# EAGLE board c64-uni-cart (EAGLE 9.5.2)
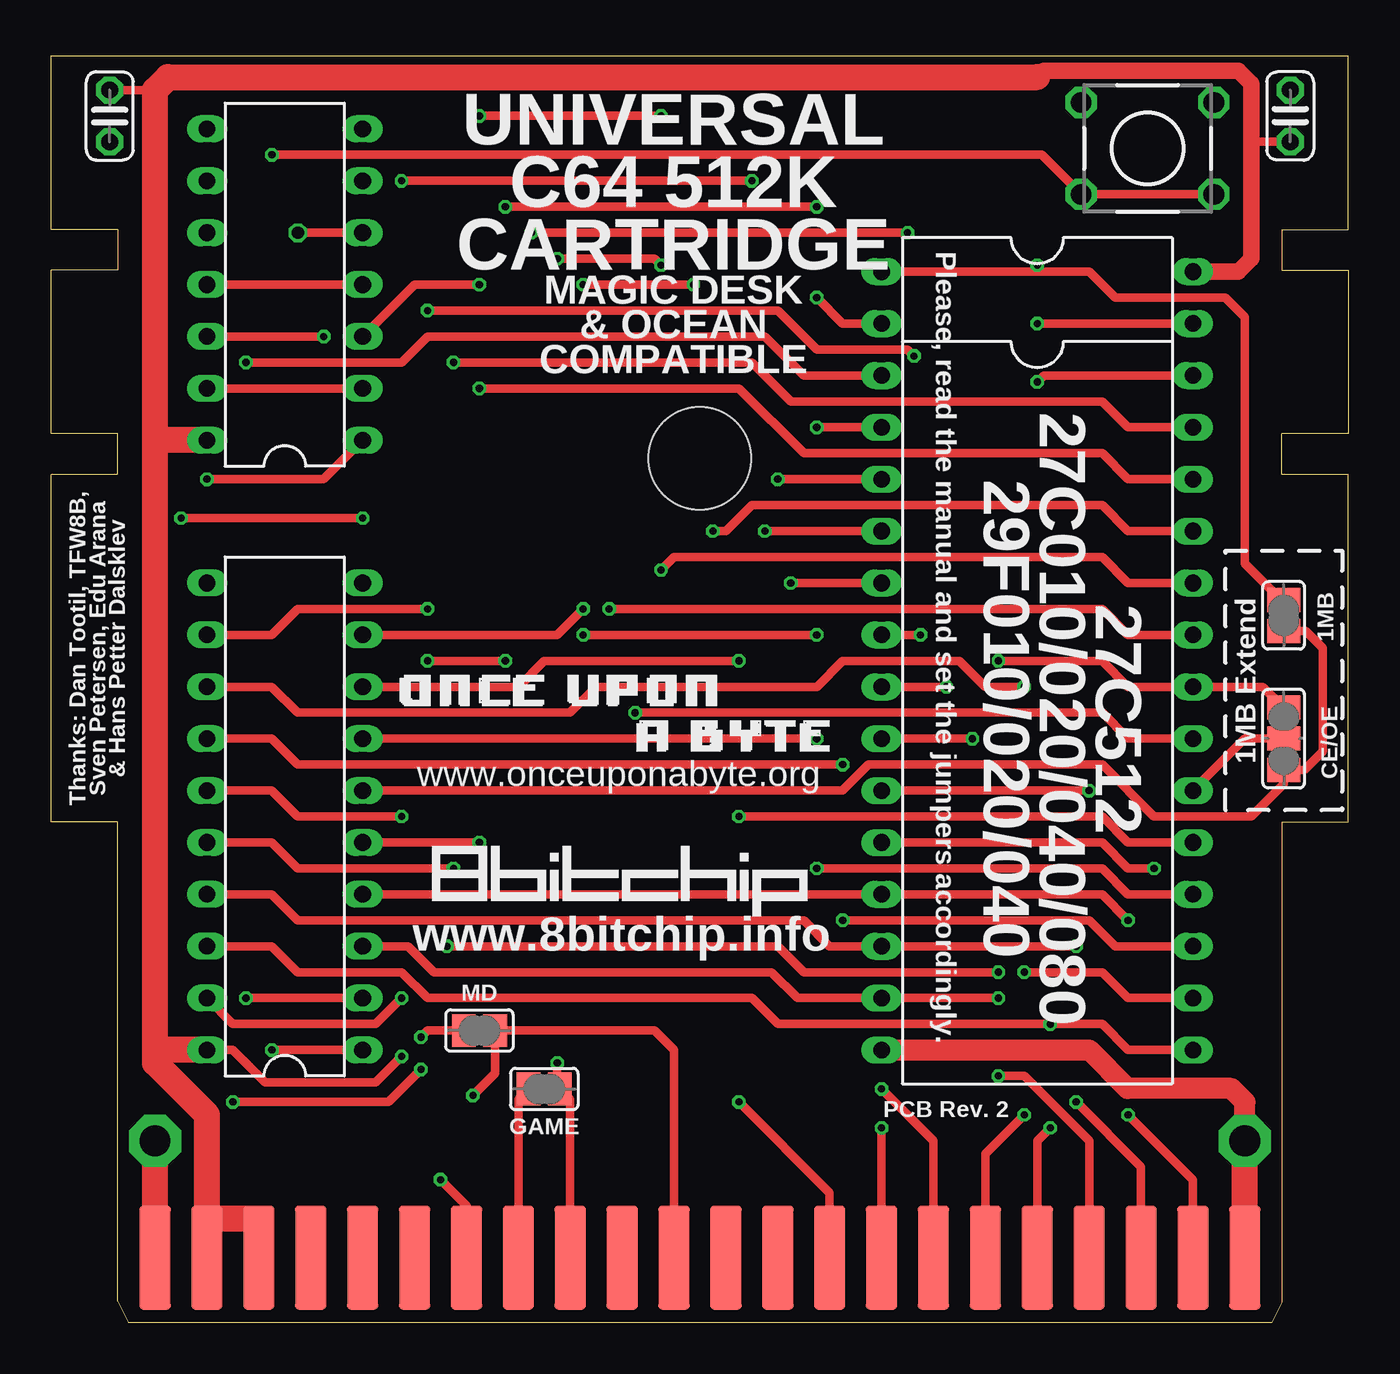
[diagram p0: board, top side]
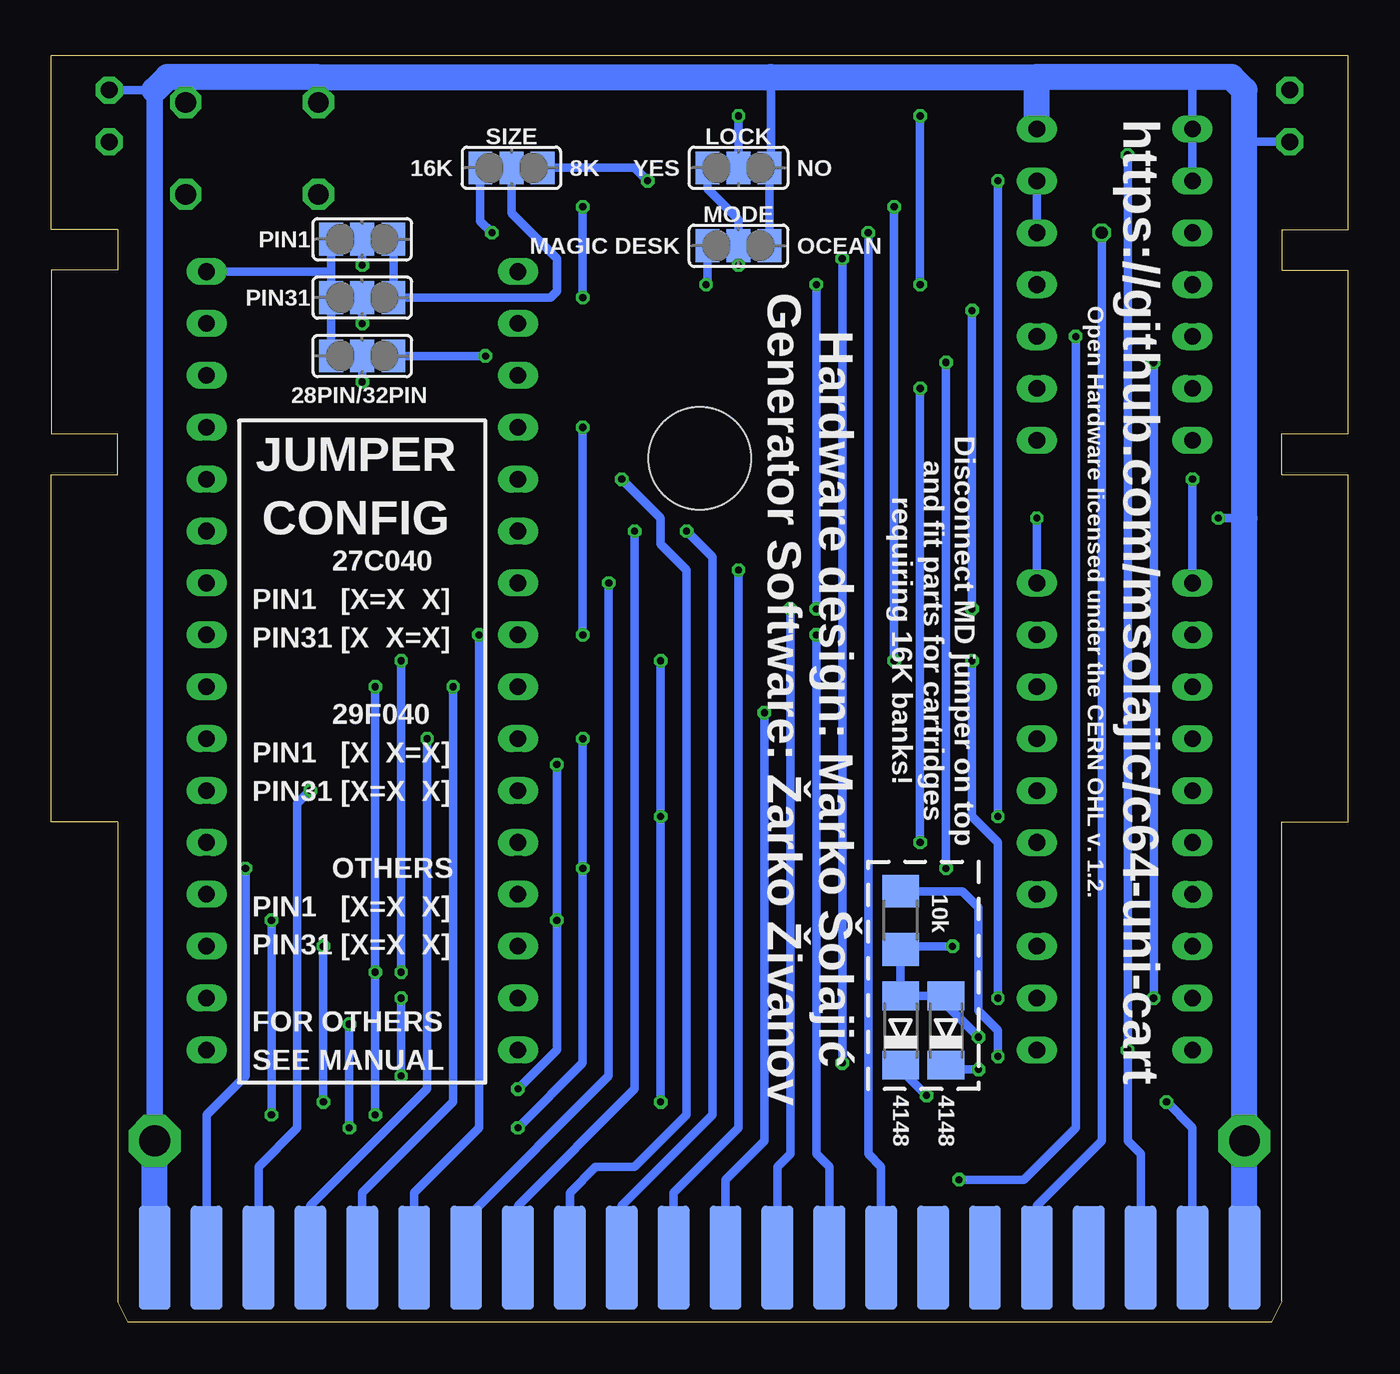
[diagram p1: board, bottom side, seen from below]

Size 63.5 x 62 mm. Coordinates in mm from the lower left corner, seen from the top.
Copper layers (1*16): Top 0.035mm / dielectric 1.5mm / Bottom 0.035mm
Design rules "dirt_cheap_dirty_boards.v1.1 *": minimum track width 6mil, minimum drill 12mil, track to track 6mil, track to pad 6mil, pad to pad 6mil, via to via 6mil, smd to smd 0mil, copper to edge 10mil, drill to drill 10mil, minimum pad ring 10mil, minimum via ring 6mil, stop-mask expansion 2mil, vias tented up to drill 25mil, thermal gap 10mil

## Footprints (pad centres in the part's own frame; a part is rotated, then mirrored left to right if it is on the bottom)
SJ = smd 1.168 x 1.6: 1 -0.762,0; 2 0.762,0
SJ_2 = smd 1.168 x 1.6: 1 -1.524,0; 2 0,0; 3 1.524,0
C025-024X044 = drill 0.813 octagon: 1 -1.27,0; 2 1.27,0
MINIMELF = smd 1.4 x 1.8: A 1.7,0; C -1.7,0
DIL20 = drill 0.813 long: 1 -11.43,-3.81; 2 -8.89,-3.81; 3 -6.35,-3.81; 4 -3.81,-3.81; 5 -1.27,-3.81; 6 1.27,-3.81; 7 3.81,-3.81; 8 6.35,-3.81; 9 8.89,-3.81; 10 11.43,-3.81; 11 11.43,3.81; 12 8.89,3.81; 13 6.35,3.81; 14 3.81,3.81; 15 1.27,3.81; 16 -1.27,3.81; 17 -3.81,3.81; 18 -6.35,3.81; 19 -8.89,3.81; 20 -11.43,3.81
DIL14 = drill 0.813 long: 1 -7.62,-3.81; 2 -5.08,-3.81; 3 -2.54,-3.81; 4 0,-3.81; 5 2.54,-3.81; 6 5.08,-3.81; 7 7.62,-3.81; 8 7.62,3.81; 9 5.08,3.81; 10 2.54,3.81; 11 0,3.81; 12 -2.54,3.81; 13 -5.08,3.81; 14 -7.62,3.81
DIL32-6 = drill 0.813 long: 1 -19.05,-7.62; 2 -16.51,-7.62; 3 -13.97,-7.62; 4 -11.43,-7.62; 5 -8.89,-7.62; 6 -6.35,-7.62; 7 -3.81,-7.62; 8 -1.27,-7.62; 9 1.27,-7.62; 10 3.81,-7.62; 11 6.35,-7.62; 12 8.89,-7.62; 13 11.43,-7.62; 14 13.97,-7.62; 15 16.51,-7.62; 16 19.05,-7.62; 17 19.05,7.62; 18 16.51,7.62; 19 13.97,7.62; 20 11.43,7.62; 21 8.89,7.62; 22 6.35,7.62; 23 3.81,7.62; 24 1.27,7.62; 25 -1.27,7.62; 26 -3.81,7.62; 27 -6.35,7.62; 28 -8.89,7.62; 29 -11.43,7.62; 30 -13.97,7.62; 31 -16.51,7.62; 32 -19.05,7.62
R1206 = smd 1.6 x 1.803: 1 -1.422,0; 2 1.422,0
DTS-6 = drill 1.016 octagon: 1 -3.25,2.25; 2 3.25,2.25; 3 -3.25,-2.25; 4 3.25,-2.25
C64_STUMPY = smd 1.524 x 5.08: 1 5.08,3.175; 2 7.62,3.175; 3 10.16,3.175; 4 12.7,3.175; 5 15.24,3.175; 6 17.78,3.175; 7 20.32,3.175; 8 22.86,3.175; 9 25.4,3.175; 10 27.94,3.175; 11 30.48,3.175; 12 33.02,3.175; 13 35.56,3.175; 14 38.1,3.175; 15 40.64,3.175; 16 43.18,3.175; 17 45.72,3.175; 18 48.26,3.175; 19 50.8,3.175; 20 53.34,3.175; 21 55.88,3.175; 22 58.42,3.175 | smd 1.524 x 5.08 bottom: A 5.08,3.175; B 7.62,3.175; C 10.16,3.175; D 12.7,3.175; E 15.24,3.175; F 17.78,3.175; H 20.32,3.175; J 22.86,3.175; K 25.4,3.175; L 27.94,3.175; M 30.48,3.175; N 33.02,3.175; P 35.56,3.175; R 38.1,3.175; S 40.64,3.175; T 43.18,3.175; U 45.72,3.175; V 48.26,3.175; W 50.8,3.175; X 53.34,3.175; Y 55.88,3.175; Z 58.42,3.175 | hole 5: 31.74,42.3

## Placement (x,y rotation side)
1MB  [SJ]  60.34,34.61 90 top
28PIN/32PIN  [SJ_2]  48.27,47.31 0 bottom
C2  100n  [C025-024X044]  2.87,59.05 270 top
C3  100n  [C025-024X044]  60.65,59.05 90 top
CE/OE  [SJ_2]  60.34,28.57 90 top
D1  [MINIMELF]  21.92,14.29 90 bottom
D2  [MINIMELF]  19.7,14.29 90 bottom
GAME  [SJ]  24.14,11.43 180 top
IC1  74LS273  [DIL20]  11.44,24.77 90 top
IC2  74LS02  [DIL14]  11.44,50.8 90 top
IC3  29F040  [DIL32-6]  48.27,32.38 270 top
LOCK  [SJ_2]  29.86,56.52 180 bottom
MD  [SJ]  20.96,14.29 180 top
MODE  [SJ_2]  29.86,52.7 0 bottom
PIN1  [SJ_2]  48.27,53.02 0 bottom
PIN31  [SJ_2]  48.27,50.16 0 bottom
R1  [R1206]  21.92,19.68 270 bottom
S3  DTS-6  [DTS-6]  53.67,57.47 180 top
SIZE  [SJ_2]  40.97,56.52 180 bottom
U$1  [C64_STUMPY]  0.01,0 0 top

## Library data of the parts
1MB 28PIN/32PIN CE/OE GAME LOCK MD MODE PIN1 PIN31 SIZE = jumper
C2 C3 = rcl
D1 D2 = diode
IC1 IC2 = 74xx-eu
IC3 = 0RB_Memory
R1 = rcl; SPICEPREFIX: R
S3 = switch-tact
U$1 = 64kb_cart-twoboxes-short

## Nets
A0: IC3.12 U$1.Y
A1: IC3.11 U$1.X
A2: IC3.10 U$1.W
A3: IC3.9 U$1.V
A4: IC3.8 U$1.U
A5: IC3.7 U$1.T
A6: IC3.6 U$1.S
A7: IC3.5 U$1.R
A8: IC3.27 U$1.P
A9: IC3.26 U$1.N
A10: IC3.23 U$1.M
A11: IC3.25 U$1.L
A12: IC3.4 U$1.K
A13: SIZE.3 U$1.J
CE: 1MB.1 CE/OE.1 IC1.6
D0: IC1.4 IC3.13 U$1.21
D1: IC1.17 IC3.14 U$1.20
D2: IC1.3 IC3.15 U$1.19
D3: IC1.18 IC3.17 U$1.18
D4: IC1.13 IC3.18 U$1.17
D5: IC1.14 IC3.19 U$1.16
D6: IC1.7 IC3.20 U$1.15
D7: IC1.8 IC3.21 U$1.14
DIS: GAME.1 LOCK.3 MODE.2 U$1.9
EN: IC1.11 IC2.1
GND: C2.2 C3.2 IC1.10 IC2.7 IC2.8 IC2.9 IC3.16 LOCK.1 MODE.3 S3.3 S3.4 U$1.1 U$1.22 U$1.A U$1.Z
IO1: IC2.12 U$1.7
IO2: U$1.10
J17: 28PIN/32PIN.2 IC3.30
J18: 1MB.2 IC3.1 PIN1.2
JF: IC3.31 PIN31.2
N$1: GAME.2 U$1.8
N$2: IC2.3 LOCK.2
N$4: CE/OE.2 IC3.22
N$5: PIN1.3 PIN31.3 SIZE.2
N$6: IC1.9 MODE.1
N$7: IC2.4 IC2.11
N$9: IC2.2 IC2.13
OE: CE/OE.3 D1.A D2.A IC3.24 MD.2 R1.2
PHI2: IC2.5 IC2.6 U$1.E
RESET: IC1.1 S3.1 S3.2 U$1.C
ROMH: D2.C U$1.B
ROML: D1.C MD.1 U$1.11
S13: IC1.5 IC3.28
S14: IC1.16 IC3.29
S15: IC1.2 IC3.3
S16: IC1.19 IC3.2
S17: 28PIN/32PIN.3 IC1.12
S18: IC1.15 SIZE.1
VCC: 28PIN/32PIN.1 C2.1 C3.1 IC1.20 IC2.14 IC3.32 PIN1.1 PIN31.1 R1.1 U$1.2 U$1.3

## Tracks (layer width: path | path; a pad name or v marks a point on that pad's centre or on a via)
A0  (via drill 0.35)
  Top 0.406: v53.98,22.23 52.71,22.23 51.45,23.5 IC3.12
  Bottom 0.406: U$1.Y 55.89,10.16 53.98,12.06 v53.98,22.23
A1  (via drill 0.35)
  Top 0.406: v50.81,26.04 IC3.11
  Bottom 0.406: U$1.X 53.35,7.62 51.45,9.53 51.45,25.4 v50.81,26.04
A2  (via drill 0.35)
  Top 0.406: v45.09,28.57 IC3.10
  Bottom 0.406: U$1.W 50.81,5.71 45.09,11.43 v45.09,28.57
A3  (via drill 0.35)
  Top 0.406: v43.82,31.11 IC3.9
  Bottom 0.406: U$1.V 48.27,6.35 43.82,10.79 v43.82,31.11
A4  (via drill 0.35)
  Top 0.406: v42.55,33.66 IC3.8
  Bottom 0.406: U$1.U 45.73,6.35 42.55,9.53 v42.55,33.66
A5  (via drill 0.35)
  Top 0.406: v36.2,36.2 IC3.7
  Bottom 0.406: U$1.T 43.19,5.08 36.2,12.06 v36.2,36.2
A6  (via drill 0.35)
  Top 0.406: v34.93,38.73 IC3.6
  Bottom 0.406: U$1.S 40.65,5.71 34.93,11.43 v34.93,38.73
A7  (via drill 0.35)
  Top 0.406: v35.57,41.27 IC3.5
  Bottom 0.406: U$1.R 38.11,6.35 36.84,7.62 34.93,7.62 32.39,10.16 32.39,36.83 33.66,38.1 33.66,39.37 v35.57,41.27
A8  (via drill 0.35)
  Top 0.406: IC3.27 52.71,38.73 51.45,40.01 34.3,40.01 33.03,38.73 v32.39,38.73
  Bottom 0.406: U$1.P 35.57,5.71 31.12,10.16 31.12,37.47 v32.39,38.73
A9  (via drill 0.35)
  Top 0.406: IC3.26 52.71,36.2 51.45,37.47 30.49,37.47 v29.86,36.83
  Bottom 0.406: U$1.N 33.03,6.35 29.86,9.53 v29.86,36.83
A10  (via drill 0.35)
  Top 0.406: v28.59,29.84 51.45,29.84 52.71,28.57 IC3.23
  Bottom 0.406: U$1.M 30.49,6.99 28.59,8.89 v28.59,29.84
A11  (via drill 0.35)
  Top 0.406: v27.32,34.92 51.45,34.92 52.71,33.66 IC3.25
  Bottom 0.406: U$1.L 27.95,7.62 27.32,8.26 v27.32,34.92
A12  (via drill 0.35)
  Top 0.406: v26.05,33.66 v37.48,33.66 | v37.48,43.81 IC3.4
  Bottom 0.406: U$1.K 25.41,7.62 26.05,8.26 v26.05,33.66 | v37.48,43.81 v37.48,33.66
A13  (via drill 0.35)
  Top 0.406: v41.92,53.34 v23.51,53.34
  Bottom 0.406: v23.51,53.34 23.51,8.26 22.87,7.62 U$1.J | SIZE.3 42.49,53.91 v41.92,53.34
CE
  Top 0.406: IC1.6 38.74,26.04 40.02,27.3 51.45,27.3 53.98,24.77 58.75,24.77 60.34,26.35 CE/OE.1 61.35,27.05 62.24,27.94 62.24,33.02 61.41,33.85 1MB.1
D0  (via drill 0.35)
  Top 0.406: U$1.21 55.89,6.99 v52.71,10.16 | v52.71,19.68 51.45,20.95 IC3.13 19.38,20.95 | IC1.4 19.38,20.95 | 19.38,20.95
  Bottom 0.406: v52.71,10.16 v52.71,19.68
D1  (via drill 0.35)
  Top 0.406: U$1.20 53.35,7.62 v50.17,10.79 | v50.17,18.41 IC3.14 38.11,18.41 36.84,19.68 12.07,19.68 10.8,20.95 IC1.17
  Bottom 0.406: v50.17,10.79 v50.17,18.41
D2  (via drill 0.35)
  Top 0.406: U$1.19 50.81,8.89 47.63,12.06 v46.36,12.06 | IC1.3 17.47,18.41 18.74,17.14 35.25,17.14 36.52,15.88 IC3.15 v46.36,15.88
  Bottom 0.406: v46.36,15.88 v46.36,12.06
D3  (via drill 0.35)
  Top 0.406: U$1.18 48.27,8.89 v48.91,9.53 | IC3.17 52.71,13.34 51.45,14.61 v48.91,14.61 35.57,14.61 34.3,15.88 19.7,15.88 18.43,15.88 17.16,17.14 12.07,17.14 10.8,18.41 IC1.18
  Bottom 0.406: v48.91,9.53 v48.91,14.61
D4  (via drill 0.35)
  Top 0.406: v47.63,17.14 51.45,17.14 52.71,15.88 IC3.18 | IC1.13 10.8,31.11 12.07,29.84 25.41,29.84 26.68,31.11 37.48,31.11 38.74,32.38 44.46,32.38 45.73,31.11 v47.63,31.11 | U$1.17 45.73,8.26 v47.63,10.16
  Bottom 0.406: v47.63,10.16 v47.63,17.14 v47.63,31.11
D5  (via drill 0.35)
  Top 0.406: U$1.16 43.19,8.89 v40.65,11.43 | v38.74,19.68 50.81,19.68 52.08,18.41 IC3.19 | IC1.14 10.8,28.57 12.07,27.3 v38.74,27.3
  Bottom 0.406: v40.65,11.43 38.74,13.34 v38.74,19.68 v38.74,27.3
D6  (via drill 0.35)
  Top 0.406: U$1.15 v40.65,9.53 | v37.48,22.23 51.45,22.23 52.71,20.95 IC3.20 | IC1.7 v37.48,28.57
  Bottom 0.406: v40.65,9.53 37.48,12.7 v37.48,22.23 v37.48,28.57
D7  (via drill 0.35)
  Top 0.406: U$1.14 38.11,6.35 v33.66,10.79 | v33.66,24.77 51.45,24.77 52.71,23.5 IC3.21 | IC1.8 22.87,31.11 24.14,32.38 v33.66,32.38
  Bottom 0.406: v33.66,10.79 v33.66,24.77 v33.66,32.38
DIS  (via drill 0.35)
  Top 0.406: v24.78,52.07 29.54,52.07 v29.86,51.75 | U$1.9 25.41,10.92 GAME.1 24.78,11.56 v24.78,12.7
  Bottom 0.406: LOCK.3 31.38,55.5 29.86,53.98 MODE.2 v29.86,51.75 | v24.78,52.07 v24.78,12.7
EN  (via drill 0.35)
  Top 0.406: v7.63,41.27 13.35,41.27 IC2.1
  Bottom 0.406: IC1.11 v7.63,41.27
GND  (via drill 0.35, 1.5 pad 2.54)
  Top 0.406: v15.25,39.37 v6.36,39.37
  Top 1.016: IC3.16 50.81,13.34 52.69,11.46 57.77,11.46 58.43,10.79 v58.43,8.89
  Top 1.27: U$1.22 v58.43,8.89 | U$1.A v5.09,8.89
  Bottom 0.406: IC2.9 IC2.8 7.63,60.96 | C3.2 58.43,60.33 | C2.2 5.09,57.78 | v6.36,39.37 5.09,39.37 | IC1.10 v15.25,39.37 | S3.4 50.42,60.88 | S3.3 56.92,60.88 56.84,60.96 | MODE.3 LOCK.1 28.27,56.58 28.27,60.96
  Bottom 0.813: 50.42,60.88 50.49,60.96 | 58.43,60.33 v58.43,8.89
  Bottom 1.27: 15.25,60.96 7.63,60.96 5.72,60.96 5.09,60.33 5.09,57.78 5.09,39.37 v5.09,8.89 U$1.A | IC2.7 15.25,60.96 | 15.25,60.96 28.27,60.96 50.49,60.96 56.84,60.96 57.79,60.96 58.43,60.33 | U$1.22 v58.43,8.89
IO1  (via drill 0.35)
  Top 0.406: U$1.7 20.33,5.71 v19.06,6.99 | v13.35,48.26 IC2.12
  Bottom 0.406: v19.06,6.99 15.88,6.99 13.35,9.53 v13.35,48.26
J17  (via drill 0.35)
  Top 0.406: v48.27,46.04 48.59,46.35 IC3.30
  Bottom 0.406: v48.27,46.04 28PIN/32PIN.2
J18  (via drill 0.35)
  Top 0.406: 1MB.2 60.21,35.37 58.43,37.15 58.43,49.21 57.48,50.16 52.08,50.16 50.81,51.44 48.27,51.44 | IC3.1 48.27,51.44 | v48.27,51.75 48.27,51.44
  Bottom 0.406: v48.27,51.75 PIN1.2
JF  (via drill 0.35)
  Top 0.406: IC3.31 v48.27,48.9
  Bottom 0.406: v48.27,48.9 PIN31.2
N$1
  Top 0.406: U$1.8 22.87,10.92 GAME.2
N$2  (via drill 0.35)
  Top 0.406: IC2.3 17.79,50.8 v20.96,50.8 | v29.86,59.05 v20.96,59.05
  Bottom 0.406: v20.96,50.8 v20.96,59.05 | v29.86,59.05 LOCK.2
N$3
  Top 0.203: 20.33,14.29 21.6,14.29
N$4
  Top 0.406: IC3.22 58.43,28.57 CE/OE.2
N$5
  Bottom 0.406: PIN1.3 PIN31.3 39.06,50.16 38.74,50.48 38.74,52.07 40.97,54.29 SIZE.2
N$6  (via drill 0.35)
  Top 0.406: IC1.9 24.78,33.66 v26.05,34.92 | v26.05,50.8 v31.44,50.8
  Bottom 0.406: v26.05,34.92 v26.05,50.8 | v31.44,50.8 31.38,50.86 MODE.1
N$7
  Top 0.406: IC2.11 IC2.4
N$8
  Bottom 0.203: 40.65,56.52 39.7,56.52
N$9
  Top 0.406: IC2.13 IC2.2
N$10
  Bottom 0.203: 31.12,56.52 30.17,56.52
N$11
  Bottom 0.203: 31.12,52.7 30.17,52.7
N$12
  Top 0.203: 60.34,27.3 60.34,28.26
OE  (via drill 0.35)
  Top 0.406: v46.36,32.38 51.45,32.38 52.71,31.11 IC3.24 59.32,31.11 CE/OE.3 | v19.38,18.41 35.57,18.41 36.84,17.14 v46.36,17.14 | v18.11,13.97 18.43,14.29 MD.2
  Bottom 0.406: v46.36,32.38 v46.36,17.14 | v19.38,18.41 21.77,18.41 R1.2 D1.A D2.A 19.7,15.56 v18.11,13.97
PHI2  (via drill 0.6)
  Top 0.406: v12.07,53.34 IC2.5
  Bottom 0.406: IC2.6 IC2.5 | U$1.E 15.25,5.71 12.07,8.89 v12.07,53.34
RESET  (via drill 0.35)
  Top 0.406: IC1.1 v10.8,13.34 | S3.1 S3.2 48.48,57.15 v10.8,57.15
  Bottom 0.406: U$1.C 10.17,8.26 10.8,8.89 v10.8,13.34 v10.8,57.15
ROMH  (via drill 0.35)
  Top 0.406: v8.9,10.79 16.52,10.79 v18.11,12.38
  Bottom 0.406: U$1.B 7.63,9.53 v8.9,10.79 | v18.11,12.38 19.49,12.38 D2.C
ROML  (via drill 0.35)
  Top 0.406: U$1.11 30.49,13.34 29.54,14.29 MD.1 21.73,12.19 v20.65,11.11
  Bottom 0.406: v20.65,11.11 21.92,12.38 D1.C
S13  (via drill 0.35)
  Top 0.406: IC3.28 52.71,41.27 51.45,42.55 36.84,42.55 33.66,45.72 v20.96,45.72 | v20.96,23.5 IC1.5
  Bottom 0.406: v20.96,45.72 v20.96,23.5
S14  (via drill 0.35)
  Top 0.406: IC3.29 52.71,43.81 51.45,45.09 36.2,45.09 34.3,46.99 v19.7,46.99 | v19.7,22.23 12.07,22.23 10.8,23.5 IC1.16
  Bottom 0.406: v19.7,46.99 v19.7,22.23
S15  (via drill 0.35)
  Top 0.406: IC3.3 36.84,46.35 34.93,48.26 18.43,48.26 17.16,46.99 v9.54,46.99 | v9.54,15.88 IC1.2
  Bottom 0.406: v9.54,46.99 v9.54,15.88
S16  (via drill 0.35)
  Top 0.406: IC1.19 8.9,14.61 15.88,14.61 v17.16,15.88 | v18.43,32.38 v22.24,32.38 | v22.24,54.61 v37.48,54.61 | v37.48,50.16 38.74,48.9 IC3.2
  Bottom 0.406: v18.43,32.38 18.43,24.77 17.16,23.5 v17.16,15.88 | v22.24,32.38 v22.24,54.61 | v37.48,54.61 v37.48,50.16
S17  (via drill 0.35)
  Top 0.406: v18.43,49.53 35.57,49.53 37.48,47.62 41.92,47.62 v42.24,47.31 | v18.43,34.92 12.07,34.92 10.8,33.66 IC1.12
  Bottom 0.406: v18.43,49.53 v18.43,34.92 | v42.24,47.31 28PIN/32PIN.3
S18  (via drill 0.35)
  Top 0.406: IC1.15 10.8,26.04 12.07,24.77 v17.16,24.77 | v17.16,55.88 v34.3,55.88
  Bottom 0.406: v17.16,24.77 v17.16,55.88 | SIZE.1 34.93,56.52 v34.3,55.88
VCC  (via drill 0.35)
  Top 0.406: C2.1 5.09,60.33 | IC1.20 8.9,13.34 10.49,11.75 15.88,11.75 v17.16,13.02 | C3.1 58.75,57.78
  Top 0.813: IC3.32 58.11,51.44 58.75,52.07 58.75,57.78 58.75,60.64 58.11,61.28 48.59,61.28 48.27,60.96
  Top 1.27: U$1.2 7.63,5.08 | 7.63,5.08 7.63,10.16 5.09,12.7 5.09,13.34 | 5.09,13.34 5.09,43.18 | 5.09,43.18 5.09,60.33 5.72,60.96 48.27,60.96 | IC1.20 5.09,13.34 | IC2.14 5.09,43.18 | U$1.3 10.17,5.08 7.63,5.08
  Bottom 0.406: PIN1.1 49.79,51.44 | 49.79,51.44 PIN31.1 28PIN/32PIN.1 | IC3.32 49.79,51.44 | v17.16,13.02 17.16,14.29 18.11,15.24 18.11,20.32 18.89,21.11 R1.1

## Text on the board
tNames: UNIVERSAL / C64 512K / CARTRIDGE | MAGIC DESK / & OCEAN / COMPATIBLE | Thanks: Dan Tootil, TFW8B, / Sven Petersen, Edu Arana / & Hans Petter Dalsklev | Please, read the manual and set the jumpers accordingly. | 1MB Extend | 27C512 / 27C010/020/040/080 / 29F010/020/040 | www.onceuponabyte.org | www.8bitchip.info | PCB Rev. 2
bNames: NO | YES | 8K | 16K | OCEAN | MAGIC DESK | JUMPER / CONFIG | https://github.com/msolajic/c64-uni-cart | Open Hardware licensed under the CERN OHL v. 1.2. | Disconnect MD jumper on top / and fit parts for cartridges / requiring 16K banks! | Hardware design: Marko Šolajić / Generator Software: Žarko Živanov | 27C040 / PIN1 [X=X X] / PIN31 [X X=X] / / 29F040 / PIN1 [X X=X] / PIN31 [X=X X] / / OTHERS / PIN1 [X=X X] / PIN31 [X=X X] / / FOR OTHERS / SEE MANUAL | 10k | 4148 | 4148